# EAGLE board VgaCrystalDiode_production_justholes (EAGLE 5.10)
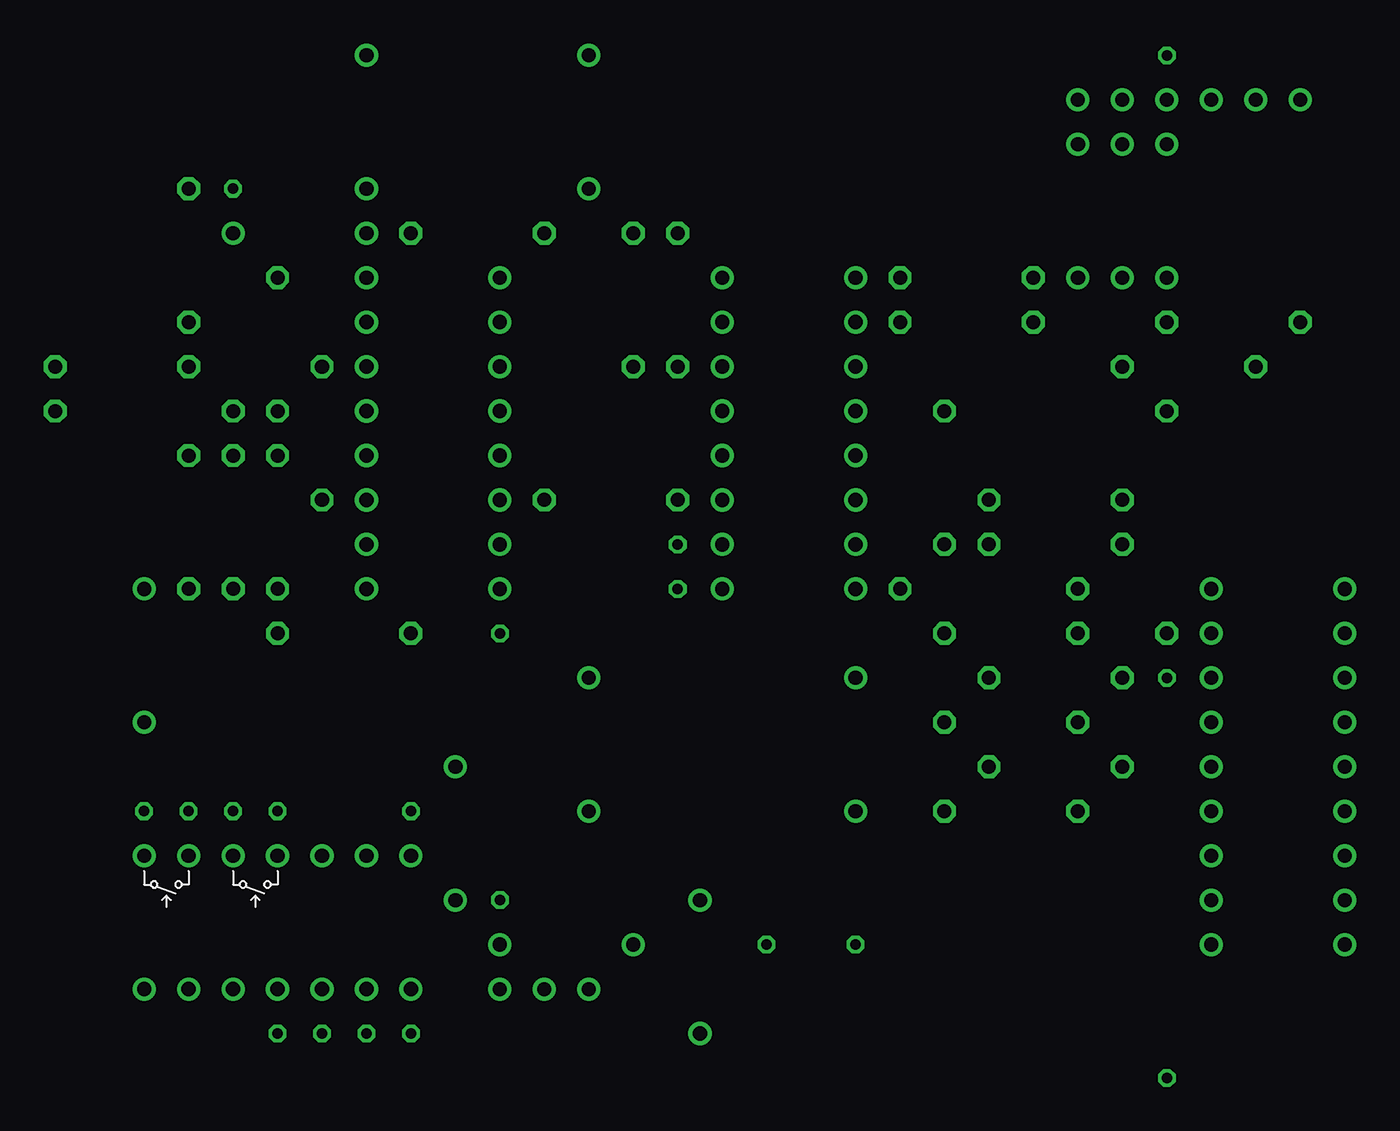
[diagram p0: board, top side]
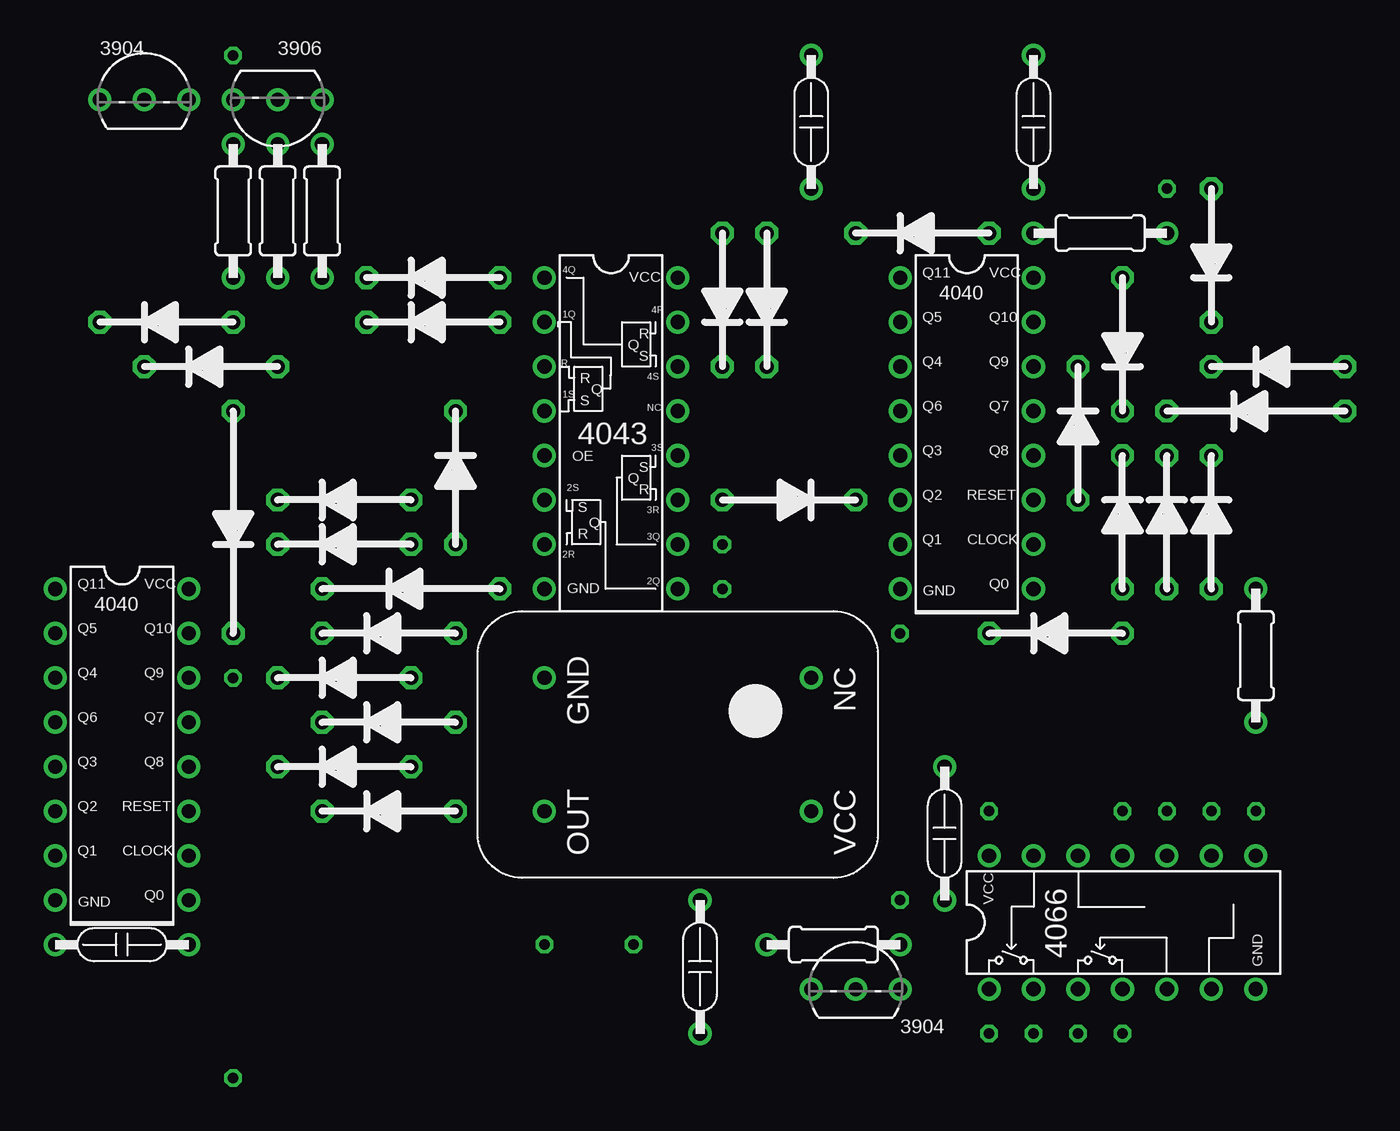
[diagram p1: board, bottom side, seen from below]

No outline drawn. Coordinates in mm, seen from the top.
Copper layers (1*16): Top 0.035mm / dielectric 1.5mm / Bottom 0.035mm
Design rules "default": minimum track width 10mil, minimum drill 24mil, track to track 8mil, track to pad 8mil, pad to pad 8mil, via to via 8mil, smd to smd 8mil, copper to edge 40mil, drill to drill 8mil, minimum pad ring 10mil, minimum via ring 8mil, stop-mask expansion 4mil, vias tented up to drill 0mil, thermal gap 10mil

## Footprints (pad centres in the part's own frame; a part is rotated, then mirrored left to right if it is on the bottom)
4043-SR-LATCH = drill 0.813 round: 1!R -3.81,1.27; 1!S -3.81,3.81; 1Q 3.81,1.27; 2!R -3.81,-3.81; 2!S -3.81,-6.35; 2Q 3.81,-8.89; 3!R 3.81,-1.27; 3!S 3.81,-3.81; 3Q 3.81,-6.35; 4!R 3.81,3.81; 4!S 3.81,6.35; 4Q -3.81,8.89; GND -3.81,-8.89; NC -3.81,6.35; OE -3.81,-1.27; VCC 3.81,8.89
DIODE = drill 0.8 octagon: P$1 -3.81,0; P$2 3.81,0
DIODE-L2 = drill 0.8 octagon: P$1 -5.08,0; P$2 5.08,0
404-BIN-COUNT = drill 0.813 round: CLOCK 3.81,-7.62; GND -3.81,-10.16; Q0 3.81,-10.16; Q1 -3.81,-7.62; Q2 -3.81,-5.08; Q3 -3.81,-2.54; Q4 -3.81,2.54; Q5 -3.81,5.08; Q6 -3.81,0; Q7 3.81,0; Q8 3.81,-2.54; Q9 3.81,2.54; Q10 3.81,5.08; Q11 -3.81,7.62; RESET 3.81,-5.08; VCC 3.81,7.62
711A-XTAL = drill 0.813 round: GND -3.81,-8.89; NC -3.81,6.35; OUT 3.81,-8.89; VCC 3.81,6.35
4066-QUAD-SW = drill 0.813 round: A1 -3.81,7.62; A2 -3.81,2.54; A3 3.81,-5.08; A4 3.81,0; B1 -3.81,5.08; B2 -3.81,0; B3 3.81,-7.62; B4 3.81,-2.54; C1 3.81,5.08; C2 -3.81,-2.54; C3 -3.81,-5.08; C4 3.81,2.54; GND -3.81,-7.62; VCC 3.81,7.62
RESISTOR = drill 0.813 round: IN1 -3.81,0; IN2 3.81,0
TRANSISTOR = drill 0.8 round: P$1 0,0; P$2 2.54,0; P$3 -2.54,0
DIODE-L3 = drill 0.8 octagon: P$1 -6.35,0; P$2 6.35,0
CAPACITOR = drill 0.813 round: IN1 -2.54,0; IN2 5.08,0

## Placement (x,y rotation side)
E$1  [4043-SR-LATCH]  46.99,41.91 0 bottom
E$3  [DIODE]  62.23,22.86 180 bottom
E$4  [DIODE-L2]  10.16,43.18 180 bottom
E$5  [404-BIN-COUNT]  74.93,25.4 0 bottom
E$6  [711A-XTAL]  41.91,24.13 270 bottom
E$7  [4066-QUAD-SW]  17.78,13.97 90 bottom
E$8  [DIODE]  12.7,36.83 90 bottom
E$9  [DIODE]  62.23,27.94 180 bottom
E$10  2K  [RESISTOR]  10.16,29.21 270 bottom
E$11  [DIODE]  62.23,35.56 180 bottom
E$12  [DIODE]  59.69,20.32 180 bottom
E$13  [DIODE]  59.69,25.4 180 bottom
E$14  [DIODE]  57.15,48.26 180 bottom
E$15  [DIODE]  40.64,49.53 270 bottom
E$16  [TRANSISTOR]  33.02,10.16 0 bottom
E$17  [DIODE]  55.88,39.37 90 bottom
E$18  [DIODE]  62.23,38.1 180 bottom
E$19  [DIODE]  59.69,30.48 180 bottom
E$20  [DIODE]  38.1,49.53 270 bottom
E$21  [DIODE-L2]  58.42,33.02 180 bottom
E$22  [DIODE]  57.15,50.8 180 bottom
E$23  2K  [RESISTOR]  34.29,12.7 180 bottom
E$24  [DIODE-L3]  68.58,36.83 270 bottom
E$25  [DIODE]  69.85,45.72 180 bottom
E$26  [DIODE]  72.39,48.26 180 bottom
E$27  [404-BIN-COUNT]  26.67,43.18 0 bottom
E$28  [DIODE]  17.78,36.83 90 bottom
E$29  [DIODE]  20.32,41.91 90 bottom
E$30  [DIODE]  21.59,30.48 180 bottom
E$31  [DIODE]  29.21,53.34 180 bottom
E$32  [DIODE]  36.83,38.1 0 bottom
E$33  [DIODE]  17.78,46.99 270 bottom
E$34  [DIODE]  12.7,52.07 270 bottom
E$35  2K  [RESISTOR]  68.58,54.61 90 bottom
E$36  2K  [RESISTOR]  66.04,54.61 90 bottom
E$37  10K  [RESISTOR]  63.5,54.61 90 bottom
E$38  [TRANSISTOR]  66.04,60.96 180 bottom
E$39  [TRANSISTOR]  73.66,60.96 0 bottom
E$40  [DIODE]  15.24,36.83 90 bottom
E$41  2K  [RESISTOR]  19.05,53.34 180 bottom
E$42  1UF  [CAPACITOR]  27.94,17.78 90 bottom
E$43  1UF  [CAPACITOR]  41.91,10.16 90 bottom
E$44  1UF  [CAPACITOR]  22.86,58.42 90 bottom
E$45  1UF  [CAPACITOR]  76.2,12.7 0 bottom
E$46  1UF  [CAPACITOR]  35.56,58.42 90 bottom
E$47  [DIODE]  8.89,45.72 180 bottom

## Library data of the parts
E$1 E$3-E$47 = RussellLibrary

## Tracks (layer width: path | path; a pad name or v marks a point on that pad's centre or on a via)
S$28  (via drill 0.6)
  other vias: 40.64,33.02
S$30  (via drill 0.6)
  other vias: 40.64,35.56
S$41  (via drill 0.6)
  other vias: 17.78,20.32
S$42  (via drill 0.6)
  other vias: 15.24,20.32
S$43  (via drill 0.6)
  other vias: 12.7,20.32
S$44  (via drill 0.6)
  other vias: 10.16,20.32
S$45  (via drill 0.6)
  other vias: 22.86,7.62
S$46  (via drill 0.6)
  other vias: 20.32,7.62
S$47  (via drill 0.6)
  other vias: 17.78,7.62
S$55  (via drill 0.6)
  other vias: 25.4,7.62
S$56  (via drill 0.6)
  other vias: 15.24,55.88
S$57  (via drill 0.6)
  other vias: 68.58,63.5
S$58  (via drill 0.6)
  other vias: 68.58,27.94
S$59  (via drill 0.6)
  other vias: 68.58,5.08
S$60  (via drill 0.6)
  other vias: 50.8,12.7
S$61  (via drill 0.6)
  other vias: 30.48,30.48
S$62  (via drill 0.6)
  other vias: 30.48,15.24
S$63  (via drill 0.6)
  other vias: 45.72,12.7
S$64  (via drill 0.6)
  other vias: 25.4,20.32

## Text on the board
bPlace: 3906 | 3904 | 3904